# EAGLE board Ocreeb MK 2 _dials half _pcb (EAGLE 9.7.0)
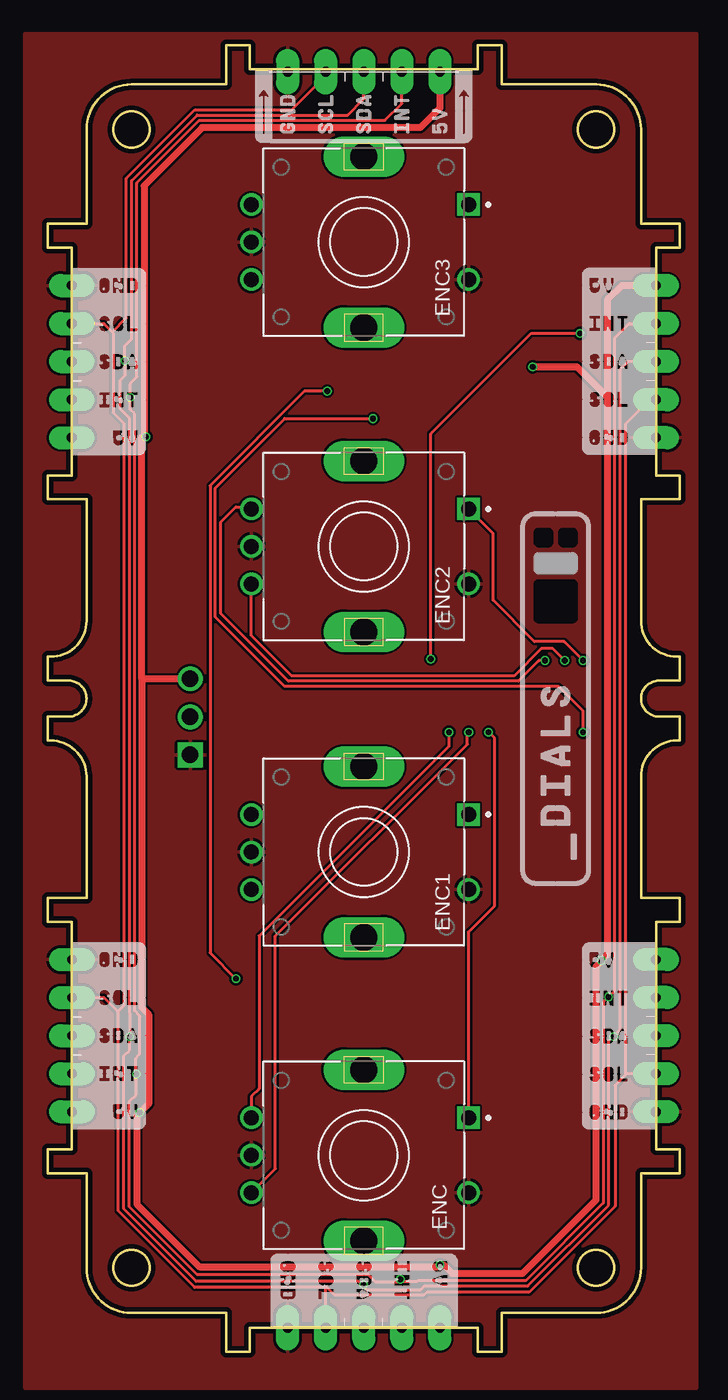
[diagram p0: board, top side]
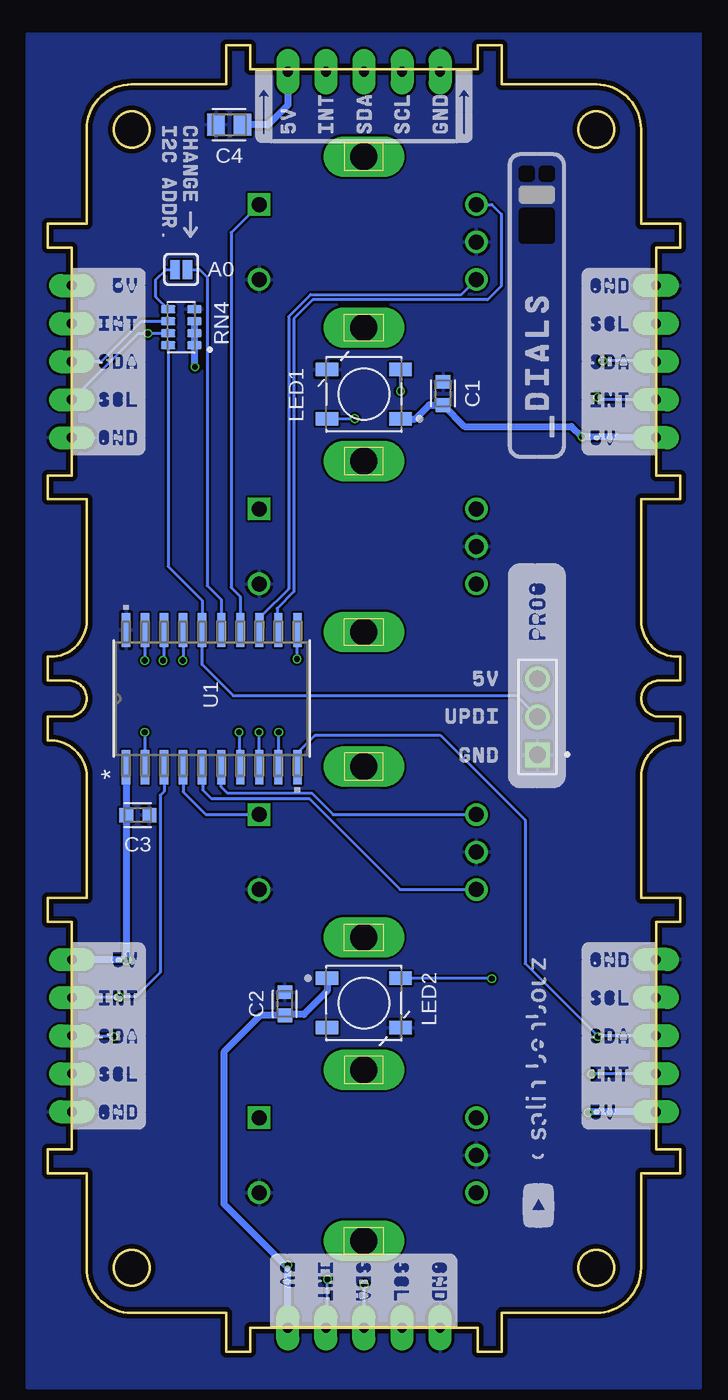
[diagram p1: board, bottom side, seen from below]

Size 42.2 x 87.2 mm. Coordinates in mm from the lower left corner, seen from the top.
Outline: 13.51,85.6 13.51,87.2 11.91,87.2 11.91,84.6 5.6,84.6 arc90 2.6,81.6 2.6,75.3 0,75.3 0,73.69 1.6,73.69 1.6,58.51 0,58.51 0,56.91 2.6,56.91 2.6,48.8 arc-90 0.2,46.4 0,46.4 0,44.8 1.4,44.8 arc-180 1.4,42.4 0,42.4 0,40.8 0.2,40.8 arc-90 2.6,38.4 2.6,30.3 0,30.3 0,28.7 1.6,28.7 1.6,13.51 0,13.51 0,11.91 2.6,11.91 2.6,5.6 arc90 5.6,2.6 11.91,2.6 11.91,0 13.51,0 13.51,1.6 28.7,1.6 28.7,0 30.3,0 30.3,2.6 36.6,2.6 arc90 39.6,5.6 39.6,11.91 42.2,11.91 42.2,13.51 40.6,13.51 40.6,28.7 42.2,28.7 42.2,30.3 39.6,30.3 39.6,38.4 arc-90 42,40.8 42.2,40.8 42.2,42.4 40.8,42.4 arc-180 40.8,44.8 42.2,44.8 42.2,46.4 42,46.4 arc-90 39.6,48.8 39.6,56.91 42.2,56.91 42.2,58.51 40.6,58.51 40.6,73.69 42.2,73.69 42.2,75.3 39.6,75.3 39.6,81.6 arc90 36.6,84.6 30.3,84.6 30.3,87.2 28.7,87.2 28.7,85.6 13.51,85.6
Outline: circle at 5.6,81.6 radius 1.2
Outline: circle at 36.6,81.6 radius 1.2
Outline: circle at 36.6,5.6 radius 1.2
Outline: circle at 5.6,5.6 radius 1.2
Copper layers (1*16): Top 0.035mm / dielectric 1.5mm / Bottom 0.035mm
Design rules "PCBWay_2L_152um-Track *": minimum track width 6mil, minimum drill 0.3mm, track to track 6mil, track to pad 6mil, pad to pad 6mil, via to via 6mil, smd to smd 0mil, copper to edge 0.3mm, drill to drill 10mil, minimum pad ring 6mil, minimum via ring 0.1mm, stop-mask expansion 2mil, vias tented up to drill 0.45mm, thermal gap 0.2mm
Net classes: 0 default: width 0.203 mm, drill 0.381 mm, clearance 0.152 mm; 1 power: width 0.457 mm, drill 0.381 mm, clearance 0.152 mm
tRestrict: area 32.5,48.7 to 35.3,51.5; area 32.5,52 to 35.3,53.3; area 32.5,53.8 to 33.7,54.9; area 34.1,53.8 to 35.3,54.9
bRestrict: area 8.4,74 to 10.7,76.3; area 8.4,76.7 to 10.7,77.8; area 9.8,78.2 to 10.7,79.1; area 8.4,78.2 to 9.4,79.1

## Footprints (pad centres in the part's own frame; a part is rotated, then mirrored left to right if it is on the bottom)
SMT-JUMPER_2_NC_PASTE_SILK = smd 0.635 x 1.27: 1 -0.406,0; 2 0.406,0
CAPC1608X85 = smd 0.921 x 0.97: 1 -0.775,0; 2 0.775,0
CAPC2012X110 = smd 1.165 x 1.465: 1 -0.875,0; 2 0.875,0
PEC11R-4215F-S0024 = drill 1 square: 1 -2.5,7 | drill 1: 2 2.5,7; A -2.5,-7.5; B 2.5,-7.5; C 0,-7.5 | drill 1.8 long: P1 -5.7,0; P2 5.7,0
WS2812B = smd 1.5 x 0.9: 1 -2.45,1.65; 2 -2.45,-1.65; 3 2.45,-1.65; 4 2.45,1.65
61300311121 = drill 1.1 square: 1 -2.54,0 | drill 1.1: 2 0,0; 3 2.54,0
RESCAF80P320X160X60-8N = smd 0.97 x 0.53: 1 -0.875,1.2; 2 -0.875,0.4; 3 -0.875,-0.4; 4 -0.875,-1.2; 5 0.875,-1.2; 6 0.875,-0.4; 7 0.875,0.4; 8 0.875,1.2
SOIC20-W_MC_MCH-M = smd 2.286 x 0.559: 1 -4.572,5.715; 2 -4.572,4.445; 3 -4.572,3.175; 4 -4.572,1.905; 5 -4.572,0.635; 6 -4.572,-0.635; 7 -4.572,-1.905; 8 -4.572,-3.175; 9 -4.572,-4.445; 10 -4.572,-5.715; 11 4.572,-5.715; 12 4.572,-4.445; 13 4.572,-3.175; 14 4.572,-1.905; 15 4.572,-0.635; 16 4.572,0.635; 17 4.572,1.905; 18 4.572,3.175; 19 4.572,4.445; 20 4.572,5.715
5_POGO_EDGE = drill 0.65 pad 1.524 long: 1 -5.08,0; 2 -2.54,0; 3 0,0; 4 2.54,0; 5 5.08,0

## Placement (x,y rotation side)
A0  JUMPER-SMT_2_NC_PASTE_SILK  [SMT-JUMPER_2_NC_PASTE_SILK]  33.29,72.25 0 bottom
C1  0.1uF  [CAPC1608X85]  15.82,63.97 270 bottom
C2  0.1uF  [CAPC1608X85]  26.38,23.23 270 bottom
C3  0.1uF  [CAPC1608X85]  36.19,35.83 180 bottom
C4  10uF  [CAPC2012X110]  30.09,81.9 0 bottom
ENC  PEC11R-4215F-S0024  [PEC11R-4215F-S0024]  21.1,13.12 270 top
ENC1  PEC11R-4215F-S0024  [PEC11R-4215F-S0024]  21.1,33.36 270 top
ENC2  PEC11R-4215F-S0024  [PEC11R-4215F-S0024]  21.1,53.76 270 top
ENC3  PEC11R-4215F-S0024  [PEC11R-4215F-S0024]  21.1,74.08 270 top
LED1  WS2812B  [WS2812B]  21.1,63.92 180 bottom
LED2  WS2812B  [WS2812B]  21.1,23.28 0 bottom
PROG  61300311121  [61300311121]  9.52,42.38 90 bottom
RN4  CAY16-103J4LF  [RESCAF80P320X160X60-8N]  33.29,68.39 180 bottom
U1  ATTINY816-SNRSOIC20-W_MC_MCH-M  [SOIC20-W_MC_MCH-M]  31.26,43.6 90 bottom
U$1  5PIN_EDGE5_POGO_EDGE_OUT_  [5_POGO_EDGE]  21.1,85.45 0 top
U$2  5PIN_EDGE  [5_POGO_EDGE]  1.61,66.1 90 top
U$3  5PIN_EDGE  [5_POGO_EDGE]  40.6,66.1 270 top
U$4  5PIN_EDGE  [5_POGO_EDGE]  21.1,1.6 180 top
U$5  5PIN_EDGE  [5_POGO_EDGE]  40.59,21.1 270 top
U$6  5PIN_EDGE  [5_POGO_EDGE]  1.62,21.1 90 top

## Library data of the parts
A0 = SparkFun-Jumpers
C1-C4 = Capacitor; CATEGORY: Capacitor
ENC ENC1-ENC3 = Switch; CREATED_BY: PCBLayout.com; DIGIKEY_PART_NUMBER: PEC11R-4215F-S0024-ND; MANUFACTURER: Bourns Inc.; MPN: PEC11R-4215F-S0024
LED1 LED2 = WS2812B; CATEGORY: LED; COLOR: RGB; DESCRIPTION: LED integrated light source; MANUFACTURER: Worldsemi; MPN: WS2812B; OPERATING_TEMP: -25 ℃ to +80℃(TJ); PART_STATUS: Active; SUB_CATEGORY: RGB
PROG = Headers; CREATED_BY: PCBLayout.com; DIGI_KEY_PART_NUMBER: 732-5316-ND; MANUFACTURER: Wurth Electronics Inc.; MPN: 61300311121
RN4 = CAY16-103J4LF; CHECK_PRICES: https://www.snapeda.com/parts/CAY16-103J4LF/Bourns+-+J.W.+Miller/view-part/?ref=eda; DESCRIPTION: Resistor, Chip Array,10 Kilohms,62 mW,+ 5%,50 V (Max.) | Bourns CAY16-103J4LF; DIGIKEY_PART_NUMBER: CAY16-103J4LFTR-ND; MF: Bourns; MP: CAY16-103J4LF; PACKAGE: 1206 Bourns; PURCHASE-URL: https://www.snapeda.com/api/url_track_click_mouser/?unipart_id=47136&manufacturer=Bourns&part_name=CAY16-103J4LF&search_term=None; SNAPEDA_LINK: https://www.snapeda.com/parts/CAY16-103J4LF/Bourns+-+J.W.+Miller/view-part/?ref=snap
U1 = Attiny816; COPYRIGHT: Copyright (C) 2023 Ultra Librarian. All rights reserved.; DIGI-KEY_PART_NUMBER_1: ATTINY816-SNRCT-ND; DIGI-KEY_PART_NUMBER_2: ATTINY816-SNRDKR-ND; DIGI-KEY_PART_NUMBER_3: ATTINY816-SNRTR-ND; MANUFACTURER_PART_NUMBER: ATTINY816-SNR; MFR_NAME: Microchip
U$1-U$6 = OCREEB_POGO_CON

## Nets
5V [power]: C1.2 C2.2 C3.2 C4.2 LED1.1 LED2.1 PROG.3 RN4.1 RN4.2 RN4.3 U1.1 U$1.5 U$2.1 U$3.1 U$4.1 U$5.1 U$6.1
ADDR0: A0.1 RN4.5
ENC1_A: ENC1.A U1.6
ENC1_B: ENC1.B U1.5
ENC1_SW: ENC1.1 U1.4
ENC2_A: ENC2.A U1.17
ENC2_B: ENC2.B U1.18
ENC2_SW: ENC2.1 U1.19
ENC3_A: ENC3.A U1.12
ENC3_B: ENC3.B U1.13
ENC3_SW: ENC3.1 U1.14
ENC_A: ENC.A U1.9
ENC_B: ENC.B U1.8
ENC_SW: ENC.1 U1.7
GND [power]: C1.1 C2.1 C3.1 C4.1 ENC1.2 ENC1.C ENC2.2 ENC2.C ENC3.2 ENC3.C ENC.2 ENC.C LED1.3 LED2.3 PROG.1 RN4.4 U1.20 U$1.1 U$2.5 U$3.5 U$4.5 U$5.5 U$6.5
INTR: U1.3 U$1.4 U$2.2 U$3.2 U$4.2 U$5.2 U$6.2
N$1: LED1.2 LED2.4
N$2: A0.2 U1.15
PIXEL: LED1.4 U1.2
SCL: RN4.7 U1.11 U$1.2 U$2.4 U$3.4 U$4.4 U$5.4 U$6.4
SDA: RN4.6 U1.10 U$1.3 U$2.3 U$3.3 U$4.3 U$5.3 U$6.3
UPDI: PROG.2 RN4.8 U1.16

## Tracks (layer width: path | path; a pad name or v marks a point on that pad's centre or on a via)
5V  (via drill 0.38)
  Top 0.457: U$1.5 26.18,83.02 24.87,81.71 10.32,81.71 6.44,77.84 6.44,61.08 | 37.36,63.72 37.36,70.22 38.32,71.18 U$3.1 | 5.96,15.76 6.75,16.55 6.75,22.52 6.29,22.98 6.29,44.92 | v32.38,65.75 35.32,65.75 37.36,63.72 | PROG.3 6.29,44.92 | 37.36,63.72 37.36,26.51 v36.97,26.12 36.97,26.08 36.6,25.72 36.6,10.14 31.7,5.23 26.99,5.23 26.42,5.8 v26.18,5.8 26.14,5.8 26.03,5.69 10.12,5.69 5.96,9.84 5.96,15.76 | 6.29,44.92 6.29,61.08 6.44,61.08 | 6.44,61.08 v6.56,61.08 | 5.96,15.76 5.96,15.8 v6.13,15.96
  Bottom 0.457: U$4.1 v26.18,5.8 26.38,5.8 30.45,9.87 30.45,20.02 28.01,22.46 C2.2 26.38,22.52 25.11,22.52 23.55,24.08 LED2.1 | U$6.1 6.02,16.02 6.08,15.96 v6.13,15.96 | U$5.1 36.8,26.18 36.86,26.12 | 36.86,26.12 v36.97,26.12 | 36.86,26.12 36.96,26.23 C3.2 36.98,35.84 U1.1 | LED1.1 17.67,62.27 16.74,63.2 C1.2 14.39,61.77 7.26,61.77 v6.56,61.08 U$2.1 | RN4.3 RN4.2 RN4.1 32.42,65.79 v32.38,65.75 | U$1.5 26.18,83.22 27.5,81.9 C4.2
ADDR0
  Bottom 0.203: A0.1 34.31,72.25 34.98,71.58 34.98,70.4 RN4.5
ENC1_A
  Bottom 0.203: ENC1.A 23.15,35.86 24.57,37.27 30.2,37.27 30.62,37.7 U1.6
ENC1_B
  Bottom 0.203: U1.5 31.87,39 31.87,37.5 31.29,36.92 24.74,36.92 18.68,30.86 ENC1.B
ENC1_SW
  Bottom 0.203: U1.4 33.16,37.38 31.65,35.86 ENC1.1
ENC2_A  (via drill 0.38)
  Top 0.203: ENC2.A 13.46,56.4 12.57,56.4 11.55,55.39 11.55,49.29 16.07,44.77 31.41,44.77 32.78,46.14 v33.19,46.14
  Bottom 0.203: U1.17 33.16,46.16 v33.19,46.14
ENC2_B  (via drill 0.38)
  Top 0.203: v34.51,46.14 33.7,46.95 32.96,46.95 31.13,45.12 16.28,45.12 13.6,47.81 ENC2.B
  Bottom 0.203: v34.51,46.14 34.44,46.22 U1.18
ENC2_SW  (via drill 0.38)
  Top 0.203: v35.73,46.14 34.46,47.41 32.49,47.41 29.73,50.17 29.73,54.63 ENC2.1
  Bottom 0.203: v35.73,46.14 35.7,46.16 U1.19
ENC3_A
  Bottom 0.203: ENC3.A 12.57,76.58 11.93,75.94 11.93,71.14 12.85,70.22 24.51,70.22 25.77,68.95 25.77,50.74 26.89,49.62 26.89,48.25 U1.12
ENC3_B
  Bottom 0.203: U1.13 27.88,48.38 27.88,49.17 26.13,50.92 26.13,69.1 24.65,70.58 14.61,70.58 ENC3.B
ENC3_SW
  Bottom 0.203: ENC3.1 29.97,74.72 29.97,51.02 29.36,50.41 U1.14
ENC_A  (via drill 0.38)
  Top 0.203: v26.79,41.37 26.79,40.45 14.11,27.76 14.11,17.55 13.6,17.04 ENC.A
  Bottom 0.203: v26.79,41.37 26.79,39.05 U1.9
ENC_B  (via drill 0.38)
  Top 0.203: ENC.B 15.21,12.23 15.21,27.75 28.01,40.55 28.01,41.26 v28.11,41.37
  Bottom 0.203: v28.11,41.37 28.11,39.05 U1.8
ENC_SW  (via drill 0.38)
  Top 0.203: ENC.1 28.1,28.04 29.83,29.77 29.83,40.97 v29.43,41.37
  Bottom 0.203: v29.43,41.37 29.43,39.1 U1.7
GND
  pour Top: -1.56,-2.42 43.35,-2.42 43.35,88 -1.56,88
  pour Bottom: -1.35,-2.42 43.55,-2.42 43.55,88 -1.35,88
INTR  (via drill 0.38)
  Top 0.203: U$1.4 23.64,83.33 22.51,82.2 10.12,82.2 5.96,78.04 5.96,65.06 5.53,64.63 v5.53,63.72 | 5.87,18.61 5.87,17.12 5.43,16.68 5.43,9.7 9.94,5.18 21.37,5.18 21.86,4.69 23.54,4.69 | 23.54,4.69 24.66,4.69 24.73,4.75 31.9,4.75 37.09,9.94 37.09,23.35 v37.42,23.69 | 5.87,18.61 5.87,19.58 6.17,19.87 6.17,22.42 5.81,22.78 5.81,62.62 5.53,62.9 v5.53,63.72 | U$3.2 38.83,68.64 37.84,67.65 37.84,24.11 v37.42,23.69 | v37.42,23.69 v37.43,23.69 | v5.53,63.72 v5.52,63.72 | v5.92,18.54 5.92,18.56 5.87,18.61 | 23.54,4.69 v23.54,4.84
  Bottom 0.203: U$5.2 37.18,23.64 37.2,23.66 37.2,23.69 | U$2.2 5.58,63.56 5.58,63.66 v5.52,63.72 | U$4.2 23.54,1.7 v23.54,4.84 | U$6.2 5.92,18.56 v5.92,18.54 | 37.2,23.69 36.34,23.69 34.7,25.33 34.7,37.14 34.44,37.4 U1.3 | 37.2,23.69 v37.43,23.69
N$1  (via drill 0.38)
  Top 0.203: v12.57,24.91 10.84,26.63 10.84,57.82 17.14,64.12 v18.66,64.12
  Bottom 0.203: LED1.2 18.66,65.56 v18.66,64.12 | v12.57,24.91 12.59,24.93 LED2.4
N$2
  Bottom 0.203: U1.15 30.62,50.2 31.57,51.14 31.57,71.74 32.07,72.25 A0.2
PIXEL  (via drill 0.38)
  Top 0.203: v21.71,62.29 15.82,62.29 11.19,57.67 11.19,49.04 15.82,44.41 34.11,44.41 35.73,42.79 v35.73,41.37
  Bottom 0.203: U1.2 35.7,41.34 v35.73,41.37 | v21.71,62.29 21.73,62.27 LED1.4
SCL  (via drill 0.38)
  Top 0.203: v25.57,46.24 25.57,61.28 32.28,67.99 v35.52,67.99 | U$2.4 3.75,68.64 4.31,68.08 | U$6.4 3.75,23.64 4.68,22.71 | 4.68,22.71 4.72,22.67 4.72,9.4 9.82,4.3 18.56,4.3 | U$4.4 18.56,4.3 | U$3.4 40.17,63.56 38.55,61.94 38.55,18.61 | 38.55,18.61 38.55,18.47 37.87,17.79 37.86,17.79 37.86,9.71 32.13,3.98 25.3,3.98 25.11,3.78 19.15,3.78 18.64,4.3 18.56,4.3 | U$5.4 38.6,18.56 38.55,18.61 | U$1.2 18.56,85.17 16.3,82.91 9.83,82.91 5.25,78.33 5.25,69.03 4.31,68.08 | 4.31,68.08 4.37,68.01 4.37,62.7 5.09,61.99 5.09,23.12 4.68,22.71
  Bottom 0.203: RN4.7 v35.52,67.99 36.13,67.99 40.56,63.56 U$3.4 | U1.11 25.57,48.15 v25.57,46.24
SDA  (via drill 0.38)
  Top 0.203: U$1.3 21.1,83.63 20.02,82.55 9.97,82.55 5.61,78.19 5.61,67.59 5.16,67.15 v5.16,66.16 5.16,65.17 4.82,64.83 4.82,62.96 5.45,62.33 5.45,22.63 5.47,22.62 v5.47,21.05 5.47,20.13 5.07,19.74 5.07,9.55 9.92,4.7 20.73,4.7 21.08,4.36 | U$3.3 38.75,66.1 38.19,65.55 38.19,21.49 37.75,21.05 | 37.75,21.05 v37.78,21.05 | 37.75,21.05 37.44,20.74 37.44,9.79 32.04,4.39 25.15,4.39 24.89,4.14 21.3,4.14 21.08,4.36 | 21.08,4.36 v21.08,4.48
  Bottom 0.203: U$5.3 37.6,21.1 37.65,21.05 v37.78,21.05 | U$2.3 1.67,66.16 v5.16,66.16 | U$6.3 5.41,21.1 v5.47,21.05 10.34,25.92 10.34,35.48 16.02,41.16 24.35,41.16 25.55,39.97 U1.10 | U$3.3 38.63,66.1 35.93,68.8 RN4.6 | U$4.3 21.08,1.62 v21.08,4.48
UPDI
  Bottom 0.203: PROG.2 10.94,43.8 29.84,43.8 31.9,45.86 U1.16 31.9,50.16 34.17,52.43 RN4.8